# EAGLE board Grabador (EAGLE 8.0.1)
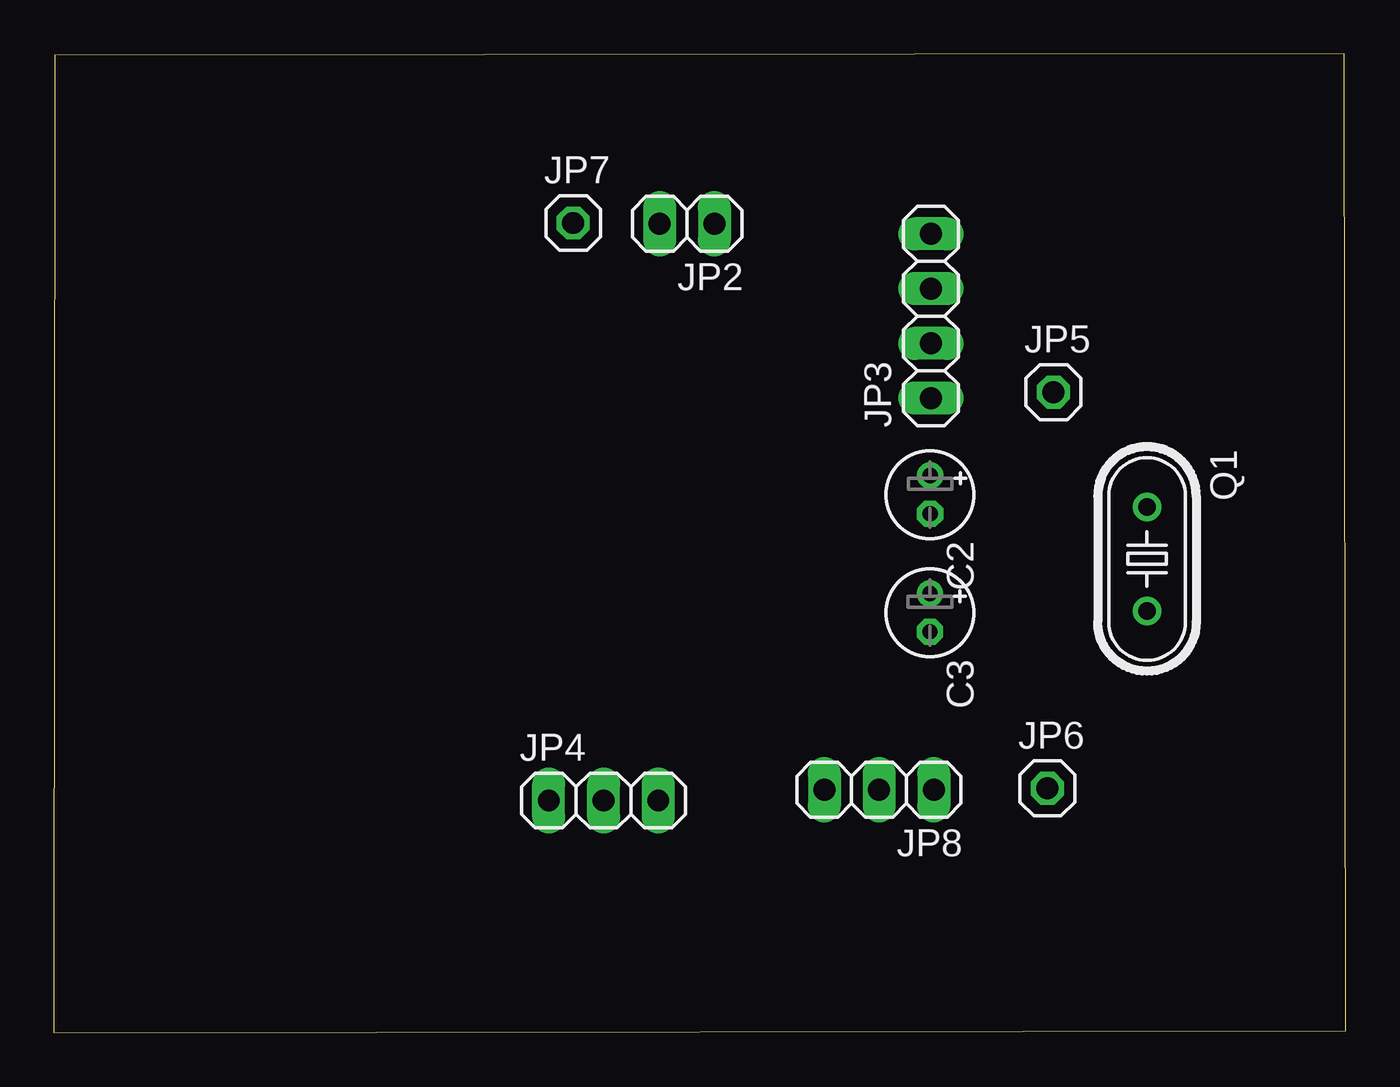
[diagram p0: board, top side]
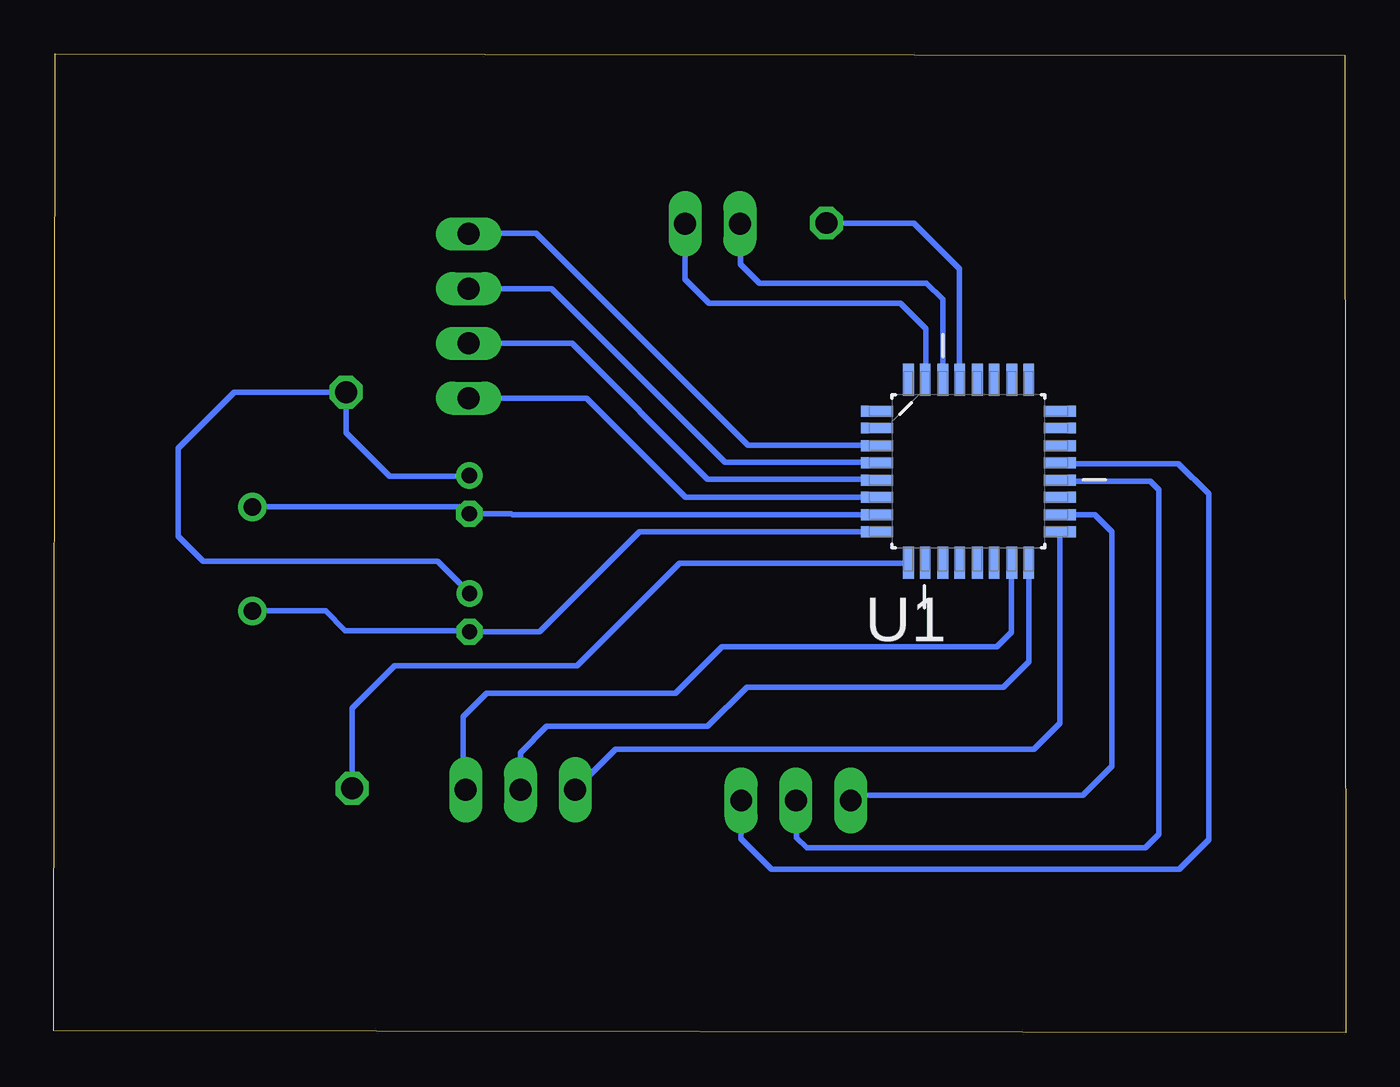
[diagram p1: board, bottom side, seen from below]

Size 59.93 x 45.41 mm. Coordinates in mm from the lower left corner, seen from the top.
Outline: 0,0 59.93,0.09 59.86,45.41 0.03,45.34 0,0
Copper layers (1*16): Top 0.035mm / dielectric 1.5mm / Bottom 0.035mm
Design rules "default": minimum track width 10mil, minimum drill 24mil, track to track 8mil, track to pad 8mil, pad to pad 8mil, via to via 8mil, smd to smd 8mil, copper to edge 40mil, drill to drill 8mil, minimum pad ring 10mil, minimum via ring 8mil, stop-mask expansion 4mil, vias tented up to drill 0mil, thermal gap 10mil

## Footprints (pad centres in the part's own frame; a part is rotated, then mirrored left to right if it is on the bottom)
E1,8-4 = drill 0.711 pad 1.168: + -0.889,0 | drill 0.711 pad 1.168 octagon: - 0.889,0
1X02 = drill 1.016 long: 1 -1.27,0; 2 1.27,0
1X04 = drill 1.016 long: 1 -3.81,0; 2 -1.27,0; 3 1.27,0; 4 3.81,0
1X03 = drill 1.016 long: 1 -2.54,0; 2 0,0; 3 2.54,0
1X01 = drill 1.016 octagon: 1 0,0
HC49U-V = drill 0.813: 1 -2.413,0; 2 2.413,0
QFP80P900X900X120-32N = smd 1.473 x 0.508: 1 -4.242,2.794; 2 -4.242,2.007; 3 -4.242,1.194; 4 -4.242,0.406; 5 -4.242,-0.406; 6 -4.242,-1.194; 7 -4.242,-2.007; 8 -4.242,-2.794; 17 4.242,-2.794; 18 4.242,-2.007; 19 4.242,-1.194; 20 4.242,-0.406; 21 4.242,0.406; 22 4.242,1.194; 23 4.242,2.007; 24 4.242,2.794 | smd 0.508 x 1.473: 9 -2.794,-4.242; 10 -2.007,-4.242; 11 -1.194,-4.242; 12 -0.406,-4.242; 13 0.406,-4.242; 14 1.194,-4.242; 15 2.007,-4.242; 16 2.794,-4.242; 25 2.794,4.242; 26 2.007,4.242; 27 1.194,4.242; 28 0.406,4.242; 29 -0.406,4.242; 30 -1.194,4.242; 31 -2.007,4.242; 32 -2.794,4.242

## Placement (x,y rotation side)
C2  [E1,8-4]  40.65,24.97 270 top
C3  [E1,8-4]  40.65,19.49 270 top
JP2  [1X02]  29.38,37.53 180 top
JP3  [1X04]  40.69,33.25 90 top
JP4  [1X03]  25.5,10.78 0 top
JP5  [1X01]  46.38,29.72 0 top
JP6  [1X01]  46.09,11.34 0 top
JP7  [1X01]  24.09,37.56 0 top
JP8  [1X03]  38.28,11.28 180 top
Q1  [HC49U-V]  50.71,21.98 270 top
U1  ATMEGA328P-AU  [QFP80P900X900X120-32N]  17.5,26.05 0 bottom

## Library data of the parts
C2 C3 = rcl
JP2-JP8 = pinhead
Q1 = crystal; OC_FARNELL: 1666969; OC_NEWARK: unknown
U1 = Ava; DESCRIPTION: 8-bit Microcontroller with In-System Programmable Flash; MPN: ATMEGA328P-AU; OC_FARNELL: 1715486; OC_NEWARK: 14R4631; PACKAGE: TQFP-32; SUPPLIER: Atmel

## Nets
GND: JP3.4 U1.3
GND1: JP3.2 U1.5
GND5: JP4.3 U1.21
MISO: JP8.2 U1.16
MOSI: JP8.1 U1.15
N$1: C2.+ C3.+ JP5.1
N$2: JP6.1 U1.9
REF: JP4.2 U1.20
RST: JP7.1 U1.29
RX: JP2.2 U1.30
SKC: JP8.3 U1.17
TX: JP2.1 U1.31
VCC: JP3.3 U1.4
VCC1: JP3.1 U1.6
VCC5: JP4.1 U1.18
XTAL0: C2.- Q1.1 U1.7
XTAL1: C3.- Q1.2 U1.8

## Tracks (layer width: path | path; a pad name or v marks a point on that pad's centre or on a via)
GND
  Bottom 0.254: U1.3 27.72,27.25 37.56,37.09 40.09,37.09 40.13,37.06 JP3.4
GND1
  Bottom 0.254: U1.5 21.79,25.69 29.59,25.69 35.89,31.98 JP3.2
GND5
  Bottom 0.254: U1.21 13.21,26.41 7.75,26.41 6.34,25 6.34,8.97 7.72,7.59 26.62,7.59 28.04,9.01 JP4.3
MISO
  Bottom 0.254: U1.16 14.69,21.79 14.69,17.22 15.87,16.03 27.78,16.03 29.59,14.22 37.06,14.22 38.28,13 JP8.2
MOSI
  Bottom 0.254: JP8.1 40.94,11.4 40.94,14.66 39.84,15.75 31.09,15.75 28.94,17.91 16.19,17.91 15.5,18.59 U1.15
N$1
  Bottom 0.254: C3.+ 42.14,21.88 53,21.88 54.16,23.03 54.16,27.13 51.56,29.72 JP5.1 46.37,27.84 44.34,25.81 40.7,25.81 C2.+
N$2
  Bottom 0.254: U1.9 20.32,21.78 30.91,21.78 35.66,17.03 44.12,17.03 46.09,15.06 JP6.1
REF
  Bottom 0.254: U1.20 13.21,25.59 9.06,25.59 8.66,25.19 8.66,9.22 9.28,8.59 25,8.59 25.47,9.06 25.47,10.75 JP4.2
RST
  Bottom 0.254: U1.29 17.91,35.44 20.03,37.56 JP7.1
RX
  Bottom 0.254: JP2.2 28.06,37.49 28.06,35.66 27.19,34.78 19.44,34.78 18.69,34.04 U1.30
SKC
  Bottom 0.254: JP8.3 33.87,13.16 14.47,13.16 13.26,14.37 U1.17
TX
  Bottom 0.254: U1.31 19.47,30.33 19.47,32.66 20.66,33.84 29.53,33.84 30.65,34.96 JP2.1
VCC
  Bottom 0.254: U1.4 21.75,26.47 28.78,26.47 36.83,34.52 JP3.3
VCC1
  Bottom 0.254: U1.6 21.75,24.84 30.62,24.84 35.22,29.44 JP3.1
VCC5
  Bottom 0.254: JP4.1 22.71,11.03 12.19,11.03 10.84,12.38 10.84,23.25 11.64,24.04 U1.18
XTAL0
  Bottom 0.254: U1.7 21.75,24.03 38.66,24.03 38.71,24.08 C2.- 40.97,24.4 Q1.1
XTAL1
  Bottom 0.254: U1.8 32.75,23.25 37.39,18.61 C3.- 40.7,18.66 46.41,18.66 47.32,19.57 Q1.2